# Altium PCB PCB1.PcbDoc (part 2 of 6)
Units mil, origin at the board's own origin, x right, y up, seen from the top; angles counter-clockwise.
Board outline 1280 x 1960 mil, 2 copper layers (Top Layer, Bottom Layer); 44 components, 63 nets, 315 pads, 89 vias.
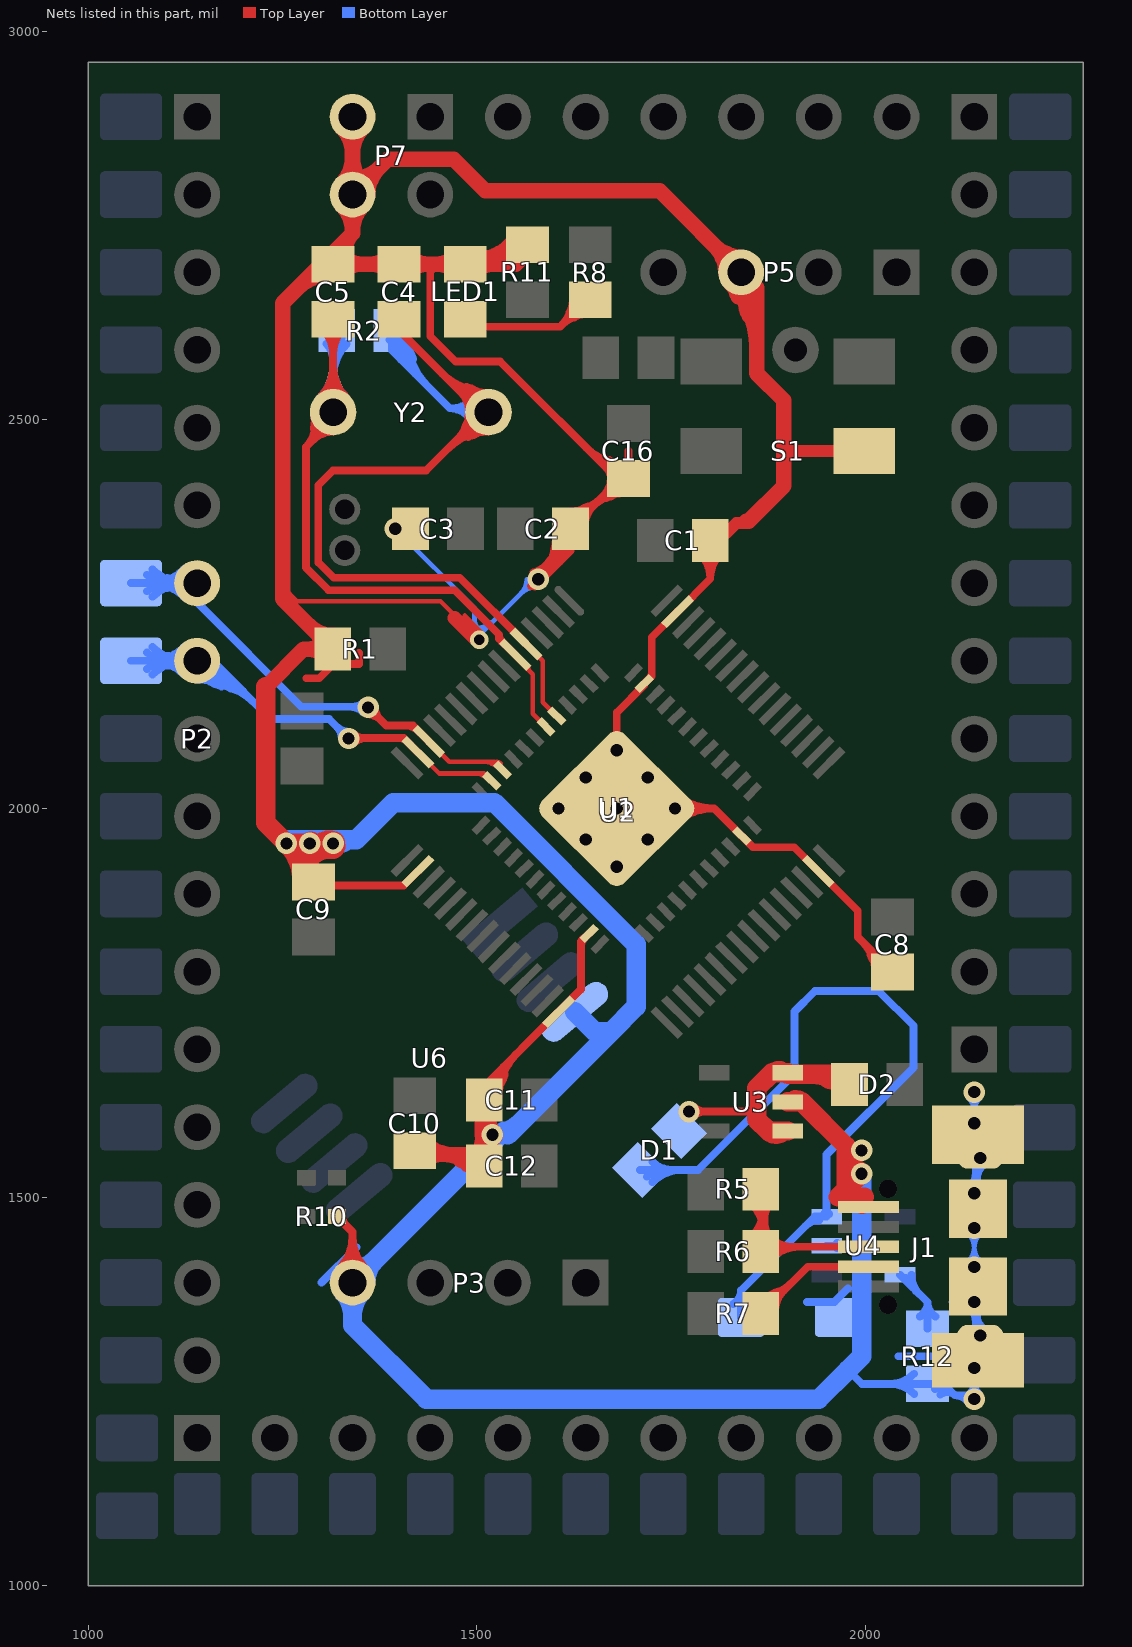
[diagram p2: the nets of this part, all layers, seen from the top]

## Via types
v1: diameter 27.56, hole 15.75, Top Layer to Bottom Layer, tented both sides, 85 vias
v2: diameter 23.62, hole 13.78, Top Layer to Bottom Layer, tented both sides, 4 vias

## Nets (pads, with @x,y where several pads share a name; then routed paths per layer and width w, separated by ;. In a path a pad name is that pad's centre, name@x,y a point inside that pad or via, vN(x,y) a via of type N, cw(c..) or ccw(c..) an arc to the next point about the centre after c; other vN are vias at no path point) (continued)
GND: C1.2 C2.1 C3.1 C4.1 C5.1 C8.2 C9.2 C10.1 C11.2 C12.2 C16.2 J1.0@2145,1290 J1.0@2145,1385 J1.0@2145,1485 J1.0@2145,1580 J1.0@2147.83,1321.83 J1.0@2147.83,1550.17 J1.4 LED1.2 P3.4 P5.3 P7.3 P7.4 pad.1@1680,2000 pad.1@1965,1345 R1.2 R10.1 R11.2 R12.1 S1.1 U1.23 U1.35 U1.47 U2.18 U2.31 U2.47 U2.63 U3.2 U4.2 U6.4 | length 20781.5
  Top Layer w6: 1250,2285 1268.22,2266.78 1453.22,2266.78 v2@1497,2223 ; 1465,2245 1471.24,2245 ; 1484.28,2248.21 1497,2235.49 ; 1486.55,2229.12 ccw(c1498.93,2232.43) v2@1496.36,2219.88 ; 1490.88,2233.45 cw(c1487.57,2221.07) v2@1500.12,2223.64 ; 1481.96,2238.04 ccw(c1497,2253.08) 1497,2231.81 cw(c1497,2253.08) 1481.96,2238.04 ; 1481.96,2238.04 cw(c1466.92,2223) 1488.19,2223 ccw(c1466.92,2223) 1481.96,2238.04
  Top Layer w10: 1280.94,2167.44 1297.21,2167.44 1315.79,2186.02 1348.19,2186.02 1348.19,2200 ; C9.2@1290,1905.43 1294.48,1900.96 1405.87,1900.96 U2.18@1424.17,1919.25 ; R10.1@1320,1475 1340,1455 P3.4@1340,1390 ; C10.1@1420,1559.57 1490.87,1559.57 C12.2@1510,1540.43 ; C10.1@1433.26,1543.45 cw(c1457.05,1502.28) 1469.33,1548.21 ; C10.1@1440.06,1568.89 ccw(c1476.74,1590.09) 1465.8,1549.16 ; 1450,2700.43 1440,2690.43 1440,2607.83 1472.83,2575 1530,2575 1680.43,2424.57 1680.43,2420 C2.1@1620.43,2360 1620.43,2331.49 ; 1466.69,1549.42 ccw(c1477.69,1566.95) C12.2@1494.47,1554.84 ; 1474.38,1554.64 ccw(c1483.71,1570.8) C12.2@1496.65,1557.35 ; 1475.72,1543.75 ccw(c1486.36,1560.69) C12.2@1502.57,1548.98 ; 1483.88,1549.15 cw(c1475.62,1534.84) C12.2@1491.58,1539.12 ; 1484.76,1538.08 ccw(c1495.02,1554.43) C12.2@1510.68,1543.13 ; 1485.89,1547.99 ccw(c1493.3,1560.83) C12.2@1503.59,1550.15 ; C11.2@1507.65,1637.34 ccw(c1502.52,1659.92) 1524.89,1653.93 ; C11.2@1509.57,1625 1509.57,1642.75 U2.31@1605.12,1738.3 1634,1767.18 1634,1828.72 U1.23@1644.51,1839.23 ; C11.2@1510.12,1627.68 ccw(c1491.54,1669.7) 1535.92,1657.81 ; C11.2@1524.04,1650.79 ccw(c1540,1646.51) C11.2@1525.69,1638.25 ; v1@1569.77,2285.83 v1(1578.94,2295) ; v1@1572.73,2303.48 ccw(c1563.46,2338.06) 1594.46,2320.16 ; v1@1575,2303.78 ccw(c1575,2346.55) 1605.25,2316.31 ; v1@1590.65,2301.71 ccw(c1539.43,2352.94) C2.1@1611.82,2355.73 ; C2.1@1601.82,2355.34 cw(c1508.27,2351.73) 1574.47,2285.53 1620.43,2331.49 ; 1606.83,2317.9 ccw(c1570.59,2354.14) C2.1@1621.81,2356.12 ; C2.1@1615.4,2338.13 cw(c1613.54,2331.49) 1620.43,2331.49 ; C2.1@1619.1,2364.31 cw(c1653,2354.85) 1643.9,2388.85 ; C2.1@1625.46,2338.13 ccw(c1627.33,2331.49) 1620.43,2331.49 ; 1663.93,2450.46 cw(c1652.99,2409.62) C16.2@1692.35,2425.07 ; 1666.44,2399.35 ccw(c1656.77,2435.42) C16.2@1692.38,2424.15 ; C16.2@1695,2424.57 1695,2460 ; pad.1@1718.78,1959.98 cw(c1733.23,1960.2) pad.1@1726.51,1973 ; pad.1@1718.78,2040.02 ccw(c1733.23,2039.8) pad.1@1726.51,2027 ; pad.1@1718.86,1960.43 cw(c1735.46,1954.15) pad.1@1731.35,1971.42 ; pad.1@1718.86,2039.57 ccw(c1735.46,2045.85) pad.1@1731.35,2028.58 ; pad.1@1742.18,1987.37 cw(c1763.38,1980.77) pad.1@1754.51,2001.12 ; pad.1@1742.18,2012.63 ccw(c1763.38,2019.23) pad.1@1754.51,1998.88 ; 1837.24,2367.28 1804.96,2335 1800.43,2335 1800.43,2295.43 1758.32,2253.32 U2.63@1758.23,2253.32 1725.1,2220.19 1725.1,2170.38 U1.47@1715.49,2160.77 1715.49,2158.84 1680,2123.34 v1(1680,2075) v1(1680,2000) v1(1755,2000) 1805.28,2000 U1.35@1840.77,1964.51 1855.28,1950 1908.43,1950 U2.47@1939.18,1919.25 1990,1868.43 1990,1834.57 C8.2@2035,1789.57 ; 2006.15,1813.03 ccw(c2040.15,1822.14) C8.2@2030.69,1788.24 ; 1340,1425.07 ccw(c1375.07,1425.07) 1350.27,1400.27 cw(c1375.07,1425.07) 1340,1425.07 ; 1340,1425.07 cw(c1304.93,1425.07) 1329.73,1400.27 ccw(c1304.93,1425.07) 1340,1425.07 ; 1340,1449.21 ccw(c1399.21,1449.21) 1357.34,1407.34 cw(c1399.21,1449.21) 1340,1449.21 ; 1340,1449.21 cw(c1280.79,1449.21) 1322.66,1407.34 ccw(c1280.79,1449.21) 1340,1449.21 ; 1468.89,1559.57 ccw(c1468.89,1514.61) 1437.1,1546.4 cw(c1468.89,1514.61) 1468.89,1559.57 ; 1468.89,1559.57 cw(c1468.89,1604.53) 1437.1,1572.74 ccw(c1468.89,1604.53) 1468.89,1559.57 ; C16.2@1672.44,2424.57 cw(c1642.12,2424.57) 1663.56,2403.13 ccw(c1642.12,2424.57) C16.2@1672.44,2424.57 ; C16.2@1672.44,2424.57 ccw(c1653.15,2424.57) 1666.79,2438.21 cw(c1653.15,2424.57) C16.2@1672.44,2424.57 ; pad.1@1701.2,2000 ccw(c1701.2,1978.8) 1686.21,1993.79 cw(c1701.2,1978.8) pad.1@1701.2,2000 ; pad.1@1701.2,2000 cw(c1701.2,2021.2) 1686.21,2006.21 ccw(c1701.2,2021.2) pad.1@1701.2,2000 ; pad.1@1718.07,1968.56 ccw(c1709.6,2006.16) pad.1@1742.17,1985.57 ; pad.1@1718.07,1968.56 ccw(c1709.6,2006.16) pad.1@1742.17,1985.57 ; pad.1@1718.07,1968.56 ccw(c1709.6,2006.16) pad.1@1742.17,1985.57 ; pad.1@1718.07,1968.56 ccw(c1709.6,2006.16) pad.1@1742.17,1985.57 ; pad.1@1718.07,2031.44 cw(c1709.6,1993.84) pad.1@1742.17,2014.43 ; pad.1@1718.07,2031.44 cw(c1709.6,1993.84) pad.1@1742.17,2014.43 ; pad.1@1718.07,2031.44 cw(c1709.6,1993.84) pad.1@1742.17,2014.43 ; pad.1@1718.07,2031.44 cw(c1709.6,1993.84) pad.1@1742.17,2014.43 ; pad.1@1720.25,1968.78 ccw(c1720.98,1994.77) pad.1@1738.84,1975.87 ; pad.1@1720.25,1968.78 ccw(c1720.98,1994.77) pad.1@1738.84,1975.87 ; pad.1@1720.25,1968.78 ccw(c1720.98,1994.77) pad.1@1738.84,1975.87 ; pad.1@1720.25,2031.22 cw(c1720.98,2005.23) pad.1@1738.84,2024.13 ; pad.1@1720.25,2031.22 cw(c1720.98,2005.23) pad.1@1738.84,2024.13 ; pad.1@1720.25,2031.22 cw(c1720.98,2005.23) pad.1@1738.84,2024.13 ; pad.1@1723.3,1968.13 ccw(c1726.34,1975.6) pad.1@1733.15,1971.29 ; pad.1@1723.3,1968.13 ccw(c1726.34,1975.6) pad.1@1733.15,1971.29 ; pad.1@1723.3,1968.13 ccw(c1726.34,1975.6) pad.1@1733.15,1971.29 ; pad.1@1723.3,1968.13 ccw(c1726.34,1975.6) pad.1@1733.15,1971.29 ; pad.1@1723.3,2031.87 cw(c1726.34,2024.4) pad.1@1733.15,2028.71 ; pad.1@1723.3,2031.87 cw(c1726.34,2024.4) pad.1@1733.15,2028.71 ; pad.1@1723.3,2031.87 cw(c1726.34,2024.4) pad.1@1733.15,2028.71 ; pad.1@1723.3,2031.87 cw(c1726.34,2024.4) pad.1@1733.15,2028.71 ; pad.1@1724.29,1967.66 ccw(c1727.09,1972.67) pad.1@1731.04,1968.5 ; pad.1@1724.29,1967.66 ccw(c1727.09,1972.67) pad.1@1731.04,1968.5 ; pad.1@1724.29,1967.66 ccw(c1727.09,1972.67) pad.1@1731.04,1968.5 ; pad.1@1724.29,2032.34 cw(c1727.09,2027.33) pad.1@1731.04,2031.5 ; pad.1@1724.29,2032.34 cw(c1727.09,2027.33) pad.1@1731.04,2031.5 ; pad.1@1724.29,2032.34 cw(c1727.09,2027.33) pad.1@1731.04,2031.5 ; pad.1@1728.66,1961.43 cw(c1736.5,1962.73) pad.1@1731.04,1968.5 ; pad.1@1728.66,1961.43 cw(c1736.5,1962.73) pad.1@1731.04,1968.5 ; pad.1@1728.66,1961.43 cw(c1736.5,1962.73) pad.1@1731.04,1968.5 ; pad.1@1728.66,2038.57 ccw(c1736.5,2037.27) pad.1@1731.04,2031.5 ; pad.1@1728.66,2038.57 ccw(c1736.5,2037.27) pad.1@1731.04,2031.5 ; pad.1@1728.66,2038.57 ccw(c1736.5,2037.27) pad.1@1731.04,2031.5 ; pad.1@1728.78,1959.75 cw(c1745.15,1959.29) pad.1@1733.9,1971.2 ; pad.1@1728.78,1959.75 cw(c1745.15,1959.29) pad.1@1733.9,1971.2 ; pad.1@1728.78,1959.75 cw(c1745.15,1959.29) pad.1@1733.9,1971.2 ; pad.1@1728.78,2040.25 ccw(c1745.15,2040.71) pad.1@1733.9,2028.8 ; pad.1@1728.78,2040.25 ccw(c1745.15,2040.71) pad.1@1733.9,2028.8 ; pad.1@1728.78,2040.25 ccw(c1745.15,2040.71) pad.1@1733.9,2028.8 ; pad.1@1731.86,1969.26 ccw(c1701.51,2002.15) pad.1@1746.23,2000.35 ; pad.1@1731.86,1969.26 ccw(c1701.51,2002.15) pad.1@1746.23,2000.35 ; pad.1@1731.86,1969.26 ccw(c1701.51,2002.15) pad.1@1746.23,2000.35 ; pad.1@1731.86,2030.74 cw(c1701.51,1997.85) pad.1@1746.23,1999.65 ; pad.1@1731.86,2030.74 cw(c1701.51,1997.85) pad.1@1746.23,1999.65 ; pad.1@1731.86,2030.74 cw(c1701.51,1997.85) pad.1@1746.23,1999.65 ; pad.1@1733.8,2000 ccw(c1733.8,2021.2) 1748.79,2006.21 cw(c1733.8,2021.2) pad.1@1733.8,2000 ; pad.1@1733.8,2000 cw(c1733.8,1978.8) 1748.79,1993.79 ccw(c1733.8,1978.8) pad.1@1733.8,2000 ; pad.1@1736.31,1984.18 ccw(c1720.75,2004.75) pad.1@1746.3,2001.21 ; pad.1@1736.31,1984.18 ccw(c1720.75,2004.75) pad.1@1746.3,2001.21 ; pad.1@1736.31,1984.18 ccw(c1720.75,2004.75) pad.1@1746.3,2001.21 ; pad.1@1736.31,2015.82 cw(c1720.75,1995.25) pad.1@1746.3,1998.79 ; pad.1@1736.31,2015.82 cw(c1720.75,1995.25) pad.1@1746.3,1998.79 ; pad.1@1736.31,2015.82 cw(c1720.75,1995.25) pad.1@1746.3,1998.79 ; pad.1@1740.18,1964.34 ccw(c1719.45,1985.49) pad.1@1746.87,1996.68 ; pad.1@1740.18,1964.34 ccw(c1719.45,1985.49) pad.1@1746.87,1996.68 ; pad.1@1740.18,1964.34 ccw(c1719.45,1985.49) pad.1@1746.87,1996.68 ; pad.1@1740.18,2035.66 cw(c1719.45,2014.51) pad.1@1746.87,2003.32 ; pad.1@1740.18,2035.66 cw(c1719.45,2014.51) pad.1@1746.87,2003.32 ; pad.1@1740.18,2035.66 cw(c1719.45,2014.51) pad.1@1746.87,2003.32 ; pad.1@1741.5,1988.1 cw(c1751.51,1974.87) pad.1@1753.79,1991.3 ; pad.1@1741.5,1988.1 cw(c1751.51,1974.87) pad.1@1753.79,1991.3 ; pad.1@1741.5,1988.1 cw(c1751.51,1974.87) pad.1@1753.79,1991.3 ; pad.1@1741.5,2011.9 ccw(c1751.51,2025.13) pad.1@1753.79,2008.7 ; pad.1@1741.5,2011.9 ccw(c1751.51,2025.13) pad.1@1753.79,2008.7 ; pad.1@1741.5,2011.9 ccw(c1751.51,2025.13) pad.1@1753.79,2008.7 ; pad.1@1749.6,1985.63 ccw(c1735.62,2000.78) pad.1@1756.22,1999.95 ; pad.1@1749.6,1985.63 ccw(c1735.62,2000.78) pad.1@1756.22,1999.95 ; pad.1@1749.6,1985.63 ccw(c1735.62,2000.78) pad.1@1756.22,1999.95 ; pad.1@1749.6,2014.37 cw(c1735.62,1999.22) pad.1@1756.22,2000.05 ; pad.1@1749.6,2014.37 cw(c1735.62,1999.22) pad.1@1756.22,2000.05 ; pad.1@1749.6,2014.37 cw(c1735.62,1999.22) pad.1@1756.22,2000.05 ; pad.1@1750.81,1974.75 ccw(c1734.34,1991.57) pad.1@1756.13,2000.46 ; pad.1@1750.81,1974.75 ccw(c1734.34,1991.57) pad.1@1756.13,2000.46 ; pad.1@1750.81,1974.75 ccw(c1734.34,1991.57) pad.1@1756.13,2000.46 ; pad.1@1750.81,2025.25 cw(c1734.34,2008.43) pad.1@1756.13,1999.54 ; pad.1@1750.81,2025.25 cw(c1734.34,2008.43) pad.1@1756.13,1999.54 ; pad.1@1750.81,2025.25 cw(c1734.34,2008.43) pad.1@1756.13,1999.54 ; pad.1@1761.44,1985.17 ccw(c1749.22,1997.64) pad.1@1765.39,2004.24 ; pad.1@1761.44,1985.17 ccw(c1749.22,1997.64) pad.1@1765.39,2004.24 ; pad.1@1761.44,1985.17 ccw(c1749.22,1997.64) pad.1@1765.39,2004.24 ; pad.1@1761.44,2014.83 cw(c1749.22,2002.36) pad.1@1765.39,1995.76 ; pad.1@1761.44,2014.83 cw(c1749.22,2002.36) pad.1@1765.39,1995.76 ; pad.1@1761.44,2014.83 cw(c1749.22,2002.36) pad.1@1765.39,1995.76 ; pad.1@1763.5,1997.79 cw(c1771.11,1995.81) pad.1@1772.95,2003.46 ; pad.1@1763.5,1997.79 cw(c1771.11,1995.81) pad.1@1772.95,2003.46 ; pad.1@1763.5,1997.79 cw(c1771.11,1995.81) pad.1@1772.95,2003.46 ; pad.1@1763.5,2002.21 ccw(c1771.11,2004.19) pad.1@1772.95,1996.54 ; pad.1@1763.5,2002.21 ccw(c1771.11,2004.19) pad.1@1772.95,1996.54 ; pad.1@1763.5,2002.21 ccw(c1771.11,2004.19) pad.1@1772.95,1996.54 ; pad.1@1769.48,2000 ccw(c1769.48,1944.93) 1722.58,1973.79 cw(c1769.48,1944.93) pad.1@1769.48,2000 ; pad.1@1769.48,2000 cw(c1769.48,2055.07) 1722.58,2026.21 ccw(c1769.48,2055.07) pad.1@1769.48,2000 ; pad.1@1776.2,2000 ccw(c1776.2,1978.8) 1761.21,1993.79 cw(c1776.2,1978.8) pad.1@1776.2,2000 ; pad.1@1776.2,2000 cw(c1776.2,2021.2) 1761.21,2006.21 ccw(c1776.2,2021.2) pad.1@1776.2,2000 ; 1787.38,2000 ccw(c1787.38,1933.92) 1731.1,1968.55 cw(c1787.38,1933.92) 1787.38,2000 ; 1787.38,2000 cw(c1787.38,2066.08) 1731.1,2031.45 ccw(c1787.38,2066.08) 1787.38,2000 ; 1800.43,2296.11 ccw(c1755.48,2296.11) 1787.27,2327.9 cw(c1755.48,2296.11) 1800.43,2296.11 ; 1800.43,2296.11 cw(c1845.39,2296.11) 1813.6,2327.9 ccw(c1845.39,2296.11) 1800.43,2296.11 ; 1805.27,2000 ccw(c1805.27,1922.91) 1739.62,1963.31 cw(c1805.27,1922.91) 1805.27,2000 ; 1805.27,2000 cw(c1805.27,2077.09) 1739.62,2036.69 ccw(c1805.27,2077.09) 1805.27,2000 ; R10.1@1326.81,1475 ccw(c1343.25,1475) 1331.63,1463.37 cw(c1343.25,1475) R10.1@1326.81,1475 ; C10.1@1426.87,1559.57 cw(c1426.87,1461.24) 1496.4,1530.77 ccw(c1426.87,1461.24) C10.1@1426.87,1559.57 ; 1451.01,1559.57 cw(c1451.01,1485.39) 1503.47,1537.84 ccw(c1451.01,1485.39) 1451.01,1559.57 ; 1475.16,1559.57 cw(c1475.16,1509.53) 1510.54,1544.91 ccw(c1475.16,1509.53) 1475.16,1559.57 ; C11.2@1518.19,1628.94 cw(c1572.34,1628.94) 1534.05,1667.23 ccw(c1572.34,1628.94) C11.2@1518.19,1628.94 ; C11.2@1528.19,1628.94 cw(c1606.49,1628.94) 1551.12,1684.3 ccw(c1606.49,1628.94) C11.2@1528.19,1628.94 ; C2.1@1620.43,2372.56 ccw(c1620.43,2402.88) 1641.87,2381.44 cw(c1620.43,2402.88) C2.1@1620.43,2372.56 ; C2.1@1620.43,2382.56 ccw(c1620.43,2437.02) 1658.94,2398.51 cw(c1620.43,2437.02) C2.1@1620.43,2382.56 ; 1634,1821.93 cw(c1650.67,1821.93) 1638.88,1833.72 ccw(c1650.67,1821.93) 1634,1821.93 ; 1634,1826.68 cw(c1641.53,1826.68) 1638.91,1833.74 ccw(c1641.53,1826.68) 1634,1826.68 ; C2.1@1639.05,2363.94 cw(c1674.51,2363.94) 1649.44,2389.01 ccw(c1674.51,2363.94) C2.1@1639.05,2363.94 ; 1641.13,2463.87 ccw(c1691.06,2513.81) 1691.06,2443.19 cw(c1691.06,2513.81) 1641.13,2463.87 ; 1648.92,2388.49 cw(c1691.06,2346.35) 1691.06,2405.94 ccw(c1691.06,2346.35) 1648.92,2388.49 ; 1658.2,2446.8 ccw(c1691.06,2479.67) 1691.06,2433.19 cw(c1691.06,2479.67) 1658.2,2446.8 ; 1665.99,2405.56 cw(c1691.06,2380.49) 1691.06,2415.94 ccw(c1691.06,2380.49) 1665.99,2405.56 ; U1.47@1721.12,2166.28 ccw(c1711.49,2175.91) 1725.1,2175.91 cw(c1711.49,2175.91) U1.47@1721.12,2166.28 ; 1996.49,1828.08 cw(c1957.98,1789.57) 2012.44,1789.57 ccw(c1957.98,1789.57) 1996.49,1828.08 ; 2005.99,1818.57 ccw(c2031.06,1843.64) 2031.06,1808.19 cw(c2031.06,1843.64) 2005.99,1818.57 ; C8.2@2013.56,1811.01 cw(c1992.12,1789.57) 2022.44,1789.57 ccw(c1992.12,1789.57) C8.2@2013.56,1811.01
  Top Layer w15: C1.2@1800.43,2345 1811.42,2345 1833.7,2367.28 1837.24,2367.28 1847.28,2367.28 ; 1895,2460 S1.1@1998.43,2460
  Top Layer w18: 1471.24,2245 v2@1496.36,2219.88 ; 1492.76,2231.25 1503,2221.01 v2(1503,2217)
  Top Layer w20: 1228.5,2156.5 1277,2205 R1.2@1314.57,2205 1250,2269.57 1250,2285 1250,2650 1340,2740 ; C9.2@1290,1905.43 C9.2@1290,1915 ; C5.1@1315,2700.43 C4.1@1400,2700.43 1450,2700.43 ; P7.4@1339.54,2790.09 cw(c1372.6,2783.32) 1363.86,2815.92 ; P7.3@1340,2890 P7.4@1340,2790 ; P7.4@1340.09,2789.54 ccw(c1333.32,2822.6) 1365.92,2813.86 ; LED1.2@1495.75,2712.23 ccw(c1510.45,2737.7) 1518.07,2709.29 ; LED1.2@1500.73,2693.62 cw(c1532.22,2675.44) 1522.81,2710.56 ; 1519.81,2709.11 cw(c1540.68,2683.2) R11.2@1555.14,2713.17 ; R11.2@1575,2725.43 1550,2700.43 ; 1814.08,2713.86 ccw(c1846.68,2722.6) P5.3@1839.91,2689.54 ; 1816.14,2715.92 cw(c1807.4,2683.32) P5.3@1840.46,2690.09 ; 1836.58,2658.2 cw(c1860.65,2672.1) P5.3@1839.64,2690.31 ; P5.3@1839.86,2670.47 cw(c1839.72,2649.54) 1857.84,2660.01 cw(c1876.84,2670.97) P5.3@1857.35,2681.04 ; 1846.55,2369.78 1849.78,2369.78 1895,2415 1895,2460 1895,2525 1860,2560 1860,2670 P5.3@1840,2690 1735,2795 1510.53,2795 1470,2835.53 1385.53,2835.53 P7.4@1340,2790 ; 1850.62,2633.88 cw(c1883.12,2652.64) P5.3@1854.76,2677.21 ; 1281.68,2205 ccw(c1281.68,2237.89) 1304.93,2214.63 cw(c1281.68,2237.89) 1281.68,2205 ; 1281.68,2205 cw(c1281.68,2172.11) 1304.93,2195.37 ccw(c1281.68,2172.11) 1281.68,2205 ; 1340,2740 ccw(c1364.14,2715.86) 1331.83,2704.83 cw(c1364.14,2715.86) 1340,2740 ; 1340,2740 P7.4@1340,2790 ; 1340,2742.86 ccw(c1292.86,2742.86) 1326.19,2776.19 cw(c1292.86,2742.86) 1340,2742.86 ; 1340,2742.86 cw(c1387.14,2742.86) 1353.81,2776.19 ccw(c1387.14,2742.86) 1340,2742.86 ; 1340,2837.14 ccw(c1387.14,2837.14) 1353.81,2803.81 cw(c1387.14,2837.14) 1340,2837.14 ; 1340,2837.14 cw(c1292.86,2837.14) 1326.19,2803.81 ccw(c1292.86,2837.14) 1340,2837.14 ; 1340,2842.86 ccw(c1292.86,2842.86) 1326.19,2876.19 cw(c1292.86,2842.86) 1340,2842.86 ; 1340,2842.86 cw(c1387.14,2842.86) 1353.81,2876.19 ccw(c1387.14,2842.86) 1340,2842.86 ; 1351.82,2700.43 ccw(c1351.82,2667.55) 1328.57,2690.8 cw(c1351.82,2667.55) 1351.82,2700.43 ; 1351.82,2700.43 cw(c1351.82,2733.32) 1328.57,2710.07 ccw(c1351.82,2733.32) 1351.82,2700.43 ; 1363.18,2700.43 ccw(c1363.18,2733.32) 1386.43,2710.07 cw(c1363.18,2733.32) 1363.18,2700.43 ; 1363.18,2700.43 cw(c1363.18,2667.55) 1386.43,2690.8 ccw(c1363.18,2667.55) 1363.18,2700.43 ; 1373.34,2823.34 ccw(c1406.67,2790) 1359.53,2790 cw(c1406.67,2790) 1373.34,2823.34 ; 1373.34,2823.34 cw(c1340,2856.67) 1340,2809.53 ccw(c1340,2856.67) 1373.34,2823.34 ; 1436.82,2700.43 ccw(c1436.82,2667.55) 1413.57,2690.8 cw(c1436.82,2667.55) 1436.82,2700.43 ; 1436.82,2700.43 cw(c1436.82,2733.32) 1413.57,2710.07 ccw(c1436.82,2733.32) 1436.82,2700.43 ; 1448.18,2700.43 ccw(c1448.18,2733.32) 1471.43,2710.07 cw(c1448.18,2733.32) 1448.18,2700.43 ; 1448.18,2700.43 cw(c1448.18,2667.55) 1471.43,2690.8 ccw(c1448.18,2667.55) 1448.18,2700.43 ; 1450,2700.43 ccw(c1450,2729.04) LED1.2@1471.04,2709.66 ; 1450,2700.43 cw(c1450,2671.83) LED1.2@1471.04,2691.21 ; 1450,2700.43 ccw(c1450,2729.04) LED1.2@1471.04,2709.66 ; 1450,2700.43 cw(c1450,2671.83) LED1.2@1471.04,2691.21 ; 1450,2700.43 ccw(c1450,2729.04) LED1.2@1471.04,2709.66 ; 1450,2700.43 cw(c1450,2671.83) LED1.2@1471.04,2691.21 ; 1450,2700.43 ccw(c1450,2729.04) LED1.2@1471.04,2709.66 ; 1450,2700.43 cw(c1450,2671.83) LED1.2@1471.04,2691.21 ; 1450,2700.43 LED1.2@1485,2700.43 ; LED1.2@1485,2700.43 ccw(c1485,2781.02) 1550.06,2733.47 cw(c1485,2781.02) LED1.2@1485,2700.43 ; LED1.2@1485,2700.43 1550,2700.43 ; 1521.82,2700.43 ccw(c1521.82,2667.55) 1498.57,2690.8 cw(c1521.82,2667.55) 1521.82,2700.43 ; 1521.82,2700.43 cw(c1521.82,2733.32) 1498.57,2710.07 ccw(c1521.82,2733.32) 1521.82,2700.43 ; 1550,2700.43 ccw(c1541.54,2708.89) 1550.67,2716.63 cw(c1541.54,2708.89) 1550,2700.43 ; 1806.66,2723.34 ccw(c1840,2756.67) 1840,2709.53 cw(c1840,2756.67) 1806.66,2723.34 ; 1806.66,2723.34 cw(c1773.33,2690) 1820.47,2690 ccw(c1773.33,2690) 1806.66,2723.34 ; 1269.66,2669.66 cw(c1311.06,2628.26) 1311.06,2686.81 ccw(c1311.06,2628.26) 1269.66,2669.66 ; 1284.59,2234.98 ccw(c1314.57,2264.95) 1314.57,2222.56 cw(c1314.57,2264.95) 1284.59,2234.98 ; R1.2@1294.1,2225.47 cw(c1277.56,2208.94) 1300.94,2208.94 ccw(c1277.56,2208.94) R1.2@1294.1,2225.47 ; 1524.39,2700.43 ccw(c1524.39,2752.23) 1566.21,2721.67 cw(c1524.39,2752.23) 1524.39,2700.43 ; P5.3@1826.19,2676.19 cw(c1744.57,2594.57) 1860,2594.57 ccw(c1744.57,2594.57) P5.3@1826.19,2676.19 ; P5.3@1840.33,2690.33 cw(c1792.86,2642.86) 1860,2642.86 ccw(c1792.86,2642.86) P5.3@1840.33,2690.33
  Top Layer w25: 1228.5,2156.5 1228.5,1981.5 v1(1255,1955) ; C9.2@1274.94,1905.63 ccw(c1206.84,1906.83) v1(1255,1955) ; C9.2@1285,1925 v1(1255,1955) ; v1@1310,1955 v1(1285,1955) v1(1255,1955) ; v1@1509.57,1580 C11.2@1509.57,1625 ; C12.2@1510,1540.43 v1@1510,1580 ; 1513.27,1594.46 cw(c1533.27,1599.82) C11.2@1517.85,1613.64 ; C12.2@1514.15,1562.79 cw(c1537.21,1562.79) v1@1520.9,1579.1 ; v1@1514.15,1568.26 ccw(c1532.33,1563.39) C12.2@1518.02,1551.16 ; U3.2@1900,1622.4 1918.29,1622.4 1975.35,1565.35 1975,1565 ; v1(1995,1530) 1975,1510 ; 1998.69,1500 1965,1500 1975,1510 ; C12.2@1501.7,1551.8 ccw(c1481.67,1571.84) 1510,1571.84 cw(c1481.67,1571.84) C12.2@1501.7,1551.8 ; C12.2@1501.7,1551.8 ccw(c1482.72,1570.79) 1509.57,1570.79 ; C12.2@1501.7,1551.8 ccw(c1482.72,1570.79) 1509.57,1570.79 ; C12.2@1501.7,1551.8 ccw(c1482.72,1570.79) 1509.57,1570.79 ; C12.2@1501.7,1551.8 ccw(c1482.72,1570.79) 1509.57,1570.79 ; C12.2@1506.96,1561.07 cw(c1535.32,1553.47) v1@1520.64,1578.89 ; C12.2@1506.96,1561.07 cw(c1535.32,1553.47) v1@1520.64,1578.89 ; C12.2@1506.96,1561.07 cw(c1535.32,1553.47) v1@1520.64,1578.89 ; C12.2@1506.96,1561.07 cw(c1535.32,1553.47) v1@1520.64,1578.89 ; C12.2@1506.96,1561.07 cw(c1535.32,1553.47) v1@1520.64,1578.89 ; C12.2@1506.96,1561.07 cw(c1535.32,1553.47) v1@1520.64,1578.89 ; C12.2@1506.96,1561.07 cw(c1535.32,1553.47) v1@1520.64,1578.89 ; C12.2@1506.96,1561.07 cw(c1535.32,1553.47) v1@1520.64,1578.89 ; C12.2@1506.96,1561.07 cw(c1535.32,1553.47) v1@1520.64,1578.89 ; C12.2@1506.96,1561.07 cw(c1535.32,1553.47) v1@1520.64,1578.89 ; C12.2@1506.96,1561.07 cw(c1535.32,1553.47) v1@1520.64,1578.89 ; C12.2@1506.96,1561.07 cw(c1535.32,1553.47) v1@1520.64,1578.89 ; C12.2@1507.2,1561.37 cw(c1535.07,1553.9) v1@1520.64,1578.89 ; C12.2@1507.2,1561.37 cw(c1535.07,1553.9) v1@1520.64,1578.89 ; C12.2@1507.2,1561.37 cw(c1535.07,1553.9) v1@1520.64,1578.89 ; 1509.57,1570.79 ccw(c1536.42,1570.79) C12.2@1517.43,1551.8 ; 1509.57,1570.79 ccw(c1536.42,1570.79) C12.2@1517.43,1551.8 ; 1509.57,1570.79 ccw(c1536.42,1570.79) C12.2@1517.43,1551.8 ; 1509.57,1570.79 ccw(c1536.42,1570.79) C12.2@1517.43,1551.8 ; 1509.57,1594.21 ccw(c1482.72,1594.21) 1501.7,1613.2 cw(c1482.72,1594.21) 1509.57,1594.21 ; 1509.57,1594.21 cw(c1536.42,1594.21) 1517.43,1613.2 ccw(c1536.42,1594.21) 1509.57,1594.21 ; C12.2@1517.43,1551.8 cw(c1535.37,1569.74) 1510,1569.74 ccw(c1535.37,1569.74) C12.2@1517.43,1551.8 ; v1@1520.9,1579.1 ccw(c1547.23,1552.77) 1510,1552.77 cw(c1547.23,1552.77) v1@1520.9,1579.1 ; 1975,1510 1975,1565 ; 1975,1565 ccw(c2013.14,1565) 1995.59,1531.14 cw(c2013.14,1565) 1975,1565 ; 1277.5,1932.5 cw(c1267.54,1922.54) 1277.89,1912.98 ccw(c1267.54,1922.54) 1277.5,1932.5 ; C11.2@1509.57,1608.28 ccw(c1548.28,1608.28) 1520.9,1580.9 cw(c1548.28,1608.28) C11.2@1509.57,1608.28 ; U3.2@1909.84,1625.06 cw(c1909.84,1611.08) 1919.72,1620.97 ccw(c1909.84,1611.08) U3.2@1909.84,1625.06 ; 1972.54,1500 cw(c1972.54,1467.4) 1995.59,1490.45 ccw(c1972.54,1467.4) 1972.54,1500 ; 1975,1501.72 cw(c2003.16,1501.72) 1995.35,1528.77 ccw(c2003.16,1501.72) 1975,1501.72
  Top Layer w30: 1277.5,1932.5 ccw(c1256.37,1953.63) v1@1286.22,1955.06 ; 1282.94,1937.94 cw(c1315,1905.88) v1@1315,1951.22 ; v1@1291.48,1946.48 cw(c1315,1922.95) v1@1315,1956.22 ; v1@1315,1950 v1@1295,1950 ; v1@1315.23,1956.2 ccw(c1310.95,1934.05) v1@1295,1950 ; v1@1315.78,1950.94 ccw(c1305.9,1939.1) v1@1295,1950
  Bottom Layer w6: v1@1393.8,2359.76 ccw(c1411.29,2363.34) 1406.67,2346.09 ; v1(1395,2360) 1497,2258 1497,2223 1503,2223 v1@1575,2295 ; v1@1395.24,2361.2 cw(c1391.66,2343.71) 1408.91,2348.33 ; v2@1497,2225.81 ccw(c1497,2247.08) 1512.04,2232.04 ; 1497,2231.81 ccw(c1497,2267.57) 1522.28,2242.28 ; 1564.22,2295 cw(c1538.2,2295) 1556.6,2276.6 cw(c1575,2258.2) v1@1575,2284.22 ; 2110,1365 v1(2140,1365) ; v1@2132.38,1247.62 ccw(c2113.98,1266.02) 2140,1266.02 ccw(c2166.02,1266.02) v1@2147.62,1247.62 ; v1@2132.38,1272.38 cw(c2113.98,1253.98) 2140,1253.98 cw(c2166.02,1253.98) v1@2147.62,1272.38 ; v1@2132.38,1287.62 ccw(c2113.98,1306.02) 2140,1306.02 ccw(c2166.02,1306.02) v1@2147.62,1287.62 ; v1@2132.38,1357.38 cw(c2113.98,1338.98) 2140,1338.98 cw(c2166.02,1338.98) v1@2147.62,1357.38 ; v1@2132.38,1372.62 ccw(c2113.98,1391.02) 2140,1391.02 ccw(c2166.02,1391.02) v1@2147.62,1372.62 ; v1@2132.38,1402.38 cw(c2113.98,1383.98) 2140,1383.98 cw(c2166.02,1383.98) v1@2147.62,1402.38 ; v1@2132.38,1417.62 ccw(c2113.98,1436.02) 2140,1436.02 ccw(c2166.02,1436.02) v1@2147.62,1417.62 ; v1@2132.38,1452.38 cw(c2113.98,1433.98) 2140,1433.98 cw(c2166.02,1433.98) v1@2147.62,1452.38 ; v1@2132.38,1467.62 ccw(c2113.98,1486.02) 2140,1486.02 ccw(c2166.02,1486.02) v1@2147.62,1467.62 ; v1@2132.38,1497.38 cw(c2113.98,1478.98) 2140,1478.98 cw(c2166.02,1478.98) v1@2147.62,1497.38 ; v1@2132.38,1512.62 ccw(c2113.98,1531.02) 2140,1531.02 ccw(c2166.02,1531.02) v1@2147.62,1512.62 ; v1@2132.38,1587.38 cw(c2113.98,1568.98) 2140,1568.98 cw(c2166.02,1568.98) v1@2147.62,1587.38 ; v1@2132.38,1602.62 ccw(c2113.98,1621.02) 2140,1621.02 ccw(c2166.02,1621.02) v1@2147.62,1602.62 ; v1@2132.38,1627.38 cw(c2113.98,1608.98) 2140,1608.98 cw(c2166.02,1608.98) v1@2147.62,1627.38 ; v1@2134.61,1289.34 ccw(c2127.34,1301.93) 2141.38,1298.16 ; v1@2134.61,1514.34 ccw(c2121.71,1536.68) 2146.63,1530 ; v1@2134.61,1585.66 cw(c2121.6,1563.13) 2146.73,1569.86 cw(c2171.87,1576.6) v1@2149.34,1589.61 ; v1@2134.84,1355.54 cw(c2123.35,1334.49) 2146.51,1340.7 cw(c2169.67,1346.9) v1@2149.2,1359.39 ; v1@2135.28,1289.69 ccw(c2126.04,1308.64) 2146.41,1303.19 ccw(c2167.5,1297.54) v1@2149.09,1285.8 ; v1(2140,1240) 2140,1245 v1(2140,1280) 2140,1281.81 v1(2140,1365) ; v1@2140,1279.28 cw(c2187.18,1279.28) J1.0@2155.15,1313.91 ; v1@2140,1293 cw(c2174.49,1293) J1.0@2151.07,1318.32 ; 2140,1306.72 cw(c2161.8,1306.72) J1.0@2147,1322.72 ; 2140,1337.15 ccw(c2162.31,1337.15) J1.0@2146.99,1320.94 ; 2140,1351.08 ccw(c2175.46,1351.08) J1.0@2151.11,1325.3 ; v1@2140,1505.25 cw(c2192.75,1505.25) J1.0@2155.45,1542.55 ; 2140,1519.74 cw(c2178.26,1519.74) J1.0@2151.21,1546.79 ; 2140,1534.22 cw(c2163.78,1534.22) J1.0@2146.96,1551.04 ; 2140,1566.09 ccw(c2163.69,1566.09) J1.0@2146.97,1549.31 ; 2140,1580.54 ccw(c2178.11,1580.54) J1.0@2151.2,1553.56 ; v1(2140,1635) v1(2140,1595) ; 2140.41,1294.54 ccw(c2151.61,1291.54) v1@2143.39,1283.37 ; 2143.11,1304.61 ccw(c2160.16,1300.04) v1@2147.64,1287.6 ; 2146.71,1530.31 ccw(c2172.07,1523.51) v1@2149.34,1510.39 ; J1.0@2155.23,1329.66 cw(c2188.61,1365) v1(2140,1365) ; J1.0@2155.44,1557.81 cw(c2192.52,1595) v1(2140,1595) ; 1413.4,2341.6 ccw(c1395,2323.2) 1395,2349.22 cw(c1395,2323.2) 1413.4,2341.6 ; 1413.4,2341.6 cw(c1431.8,2360) 1405.78,2360 ccw(c1431.8,2360) 1413.4,2341.6 ; 1497,2244.27 ccw(c1518.27,2244.27) 1503.23,2229.23 cw(c1518.27,2244.27) 1497,2244.27 ; 1497,2244.27 cw(c1475.73,2244.27) 1490.77,2229.23 ccw(c1475.73,2244.27) 1497,2244.27 ; v1(2140,1365) v1(2140,1410) v1(2140,1460) v1(2140,1505) v1(2140,1595)
  Bottom Layer w10: 1300.13,1390 1345.49,1435.35 ; 1924.71,1365 1960.08,1365 1977.46,1382.38 ; U4.2@1950,1437.4 1992.4,1437.4 1995,1440 ; 1977.5,1277.5 1995.43,1259.57 R12.1@2080,1259.57 2100.43,1259.57 2115,1245 ; 2042.44,1295 2126.81,1295 v1@2140,1281.81 ; v1@2132.58,1235.31 ccw(c2115,1224.21) 2115,1245 ; v1@2140,1245 2115,1245 ; 1971.53,1437.4 ccw(c1971.53,1425.71) 1963.27,1433.98 cw(c1971.53,1425.71) 1971.53,1437.4 ; 1971.53,1437.4 cw(c1971.53,1449.09) 1963.27,1440.83 ccw(c1971.53,1449.09) 1971.53,1437.4 ; 2031.11,1259.57 ccw(c2031.11,1304.52) 2062.9,1272.73 cw(c2031.11,1304.52) 2031.11,1259.57 ; 2031.11,1259.57 cw(c2031.11,1214.61) 2062.9,1246.4 ccw(c2031.11,1214.61) 2031.11,1259.57 ; 2115,1245 ccw(c2105.31,1235.31) 2096.25,1245.59 cw(c2105.31,1235.31) 2115,1245 ; R12.1@2089.64,1253.1 cw(c2098.25,1243.32) 2107.47,1252.53 ccw(c2098.25,1243.32) R12.1@2089.64,1253.1
  Bottom Layer w20: P7.4@1340,2790 P7.4@1350,2790
  Bottom Layer w25: v1@1255,1960 1345,1960 1392.5,2007.5 1522.5,2007.5 1705,1825 1705,1745 1672.5,1712.5 ; v1@1255.9,1954.1 cw(c1270.16,1939.84) 1270.16,1960 ; 1269.84,1960 cw(c1269.84,1939.84) v1@1284.1,1954.1 ; v1@1285.9,1954.1 cw(c1300.16,1939.84) 1300.16,1960 ; v1@1295,1960 cw(c1295,1937.91) v1@1313.91,1949.34 ; 1299.84,1960 cw(c1299.84,1939.84) v1@1314.1,1954.1 ; v1@1315.49,1956.18 ccw(c1321.69,1971.18) 1329.81,1957.12 ; v1@1315.9,1949.1 cw(c1342.23,1922.77) 1342.23,1960 ; v1@1315.9,1954.1 cw(c1330.16,1939.84) 1330.16,1960 ; 1540,1580 1672.5,1712.5 ; U6.4@1626.1,1738.25 1651.85,1712.5 1672.5,1712.5 ; v1(1995,1530) 1995,1440 1995,1295 1977.5,1277.5 1940,1240 1435,1240 1340,1335 P3.4@1340,1390 1535,1585 ; 1340,1348.89 ccw(c1298.89,1348.89) 1327.96,1377.96 cw(c1298.89,1348.89) 1340,1348.89 ; 1340,1348.89 cw(c1381.11,1348.89) 1352.04,1377.96 ccw(c1381.11,1348.89) 1340,1348.89 ; 1369.07,1419.07 ccw(c1398.14,1390) 1357.03,1390 cw(c1398.14,1390) 1369.07,1419.07 ; 1369.07,1419.07 cw(c1340,1448.14) 1340,1407.03 ccw(c1340,1448.14) 1369.07,1419.07 ; 1535,1585 cw(c1524.48,1595.51) 1520.36,1581.23 ccw(c1524.48,1595.51) 1535,1585 ; 1510.74,1560.74 ccw(c1491.49,1580) 1518.72,1580 cw(c1491.49,1580) 1510.74,1560.74 ; v1@1520,1581.28 ccw(c1520,1632.65) 1556.33,1596.33 cw(c1520,1632.65) v1@1520,1581.28
  other v1: 1995,1560 1520,1580 1680,1925 1315,1955 1640,1960 1720,1960 1605,2000 1640,2040 1720,2040
NetD1_1: D1.1 pad.1@1840,1345 U4.3 | length 1338.8
  Bottom Layer w10: D1.1@1709.95,1534.94 1784.94,1534.94 1908.78,1658.78 1908.78,1738.78 1935,1765 2017.3,1765 2062,1720.3 2062,1666.64 1950,1554.64 U4.3@1950,1474.8 1934.8,1474.8 1840,1380 ; pad.1@1840,1345 1840,1380 ; 1840,1380 ccw(c1860.62,1380) 1850.15,1362.23 cw(c1860.62,1380) 1840,1380 ; 1840,1380 cw(c1819.38,1380) 1829.85,1362.23 ccw(c1819.38,1380) 1840,1380 ; 1950,1486.49 ccw(c1961.69,1486.49) 1953.42,1478.23 cw(c1961.69,1486.49) 1950,1486.49 ; 1950,1486.49 cw(c1938.31,1486.49) 1946.58,1478.23 ccw(c1938.31,1486.49) 1950,1486.49 ; D1.1@1718.83,1526.06 cw(c1740.27,1504.62) 1740.27,1534.95 ccw(c1740.27,1504.62) D1.1@1718.83,1526.06 ; D1.1@1725.9,1518.99 cw(c1764.41,1480.48) 1764.41,1534.94 ccw(c1764.41,1480.48) D1.1@1725.9,1518.99 ; D1.1@1725.9,1545.33 ccw(c1750.97,1570.4) 1750.97,1534.94 cw(c1750.97,1570.4) D1.1@1725.9,1545.33 ; 1922.75,1462.75 cw(c1940.16,1445.34) 1940.16,1469.96 ccw(c1940.16,1445.34) 1922.75,1462.75
NetD1_2: D1.2 D2.2 U3.1 U3.3 | length 600.8
  Top Layer w10: v1(1773,1610) 1855,1610 1860,1615 ; 1794.2,1610 ccw(c1794.2,1588.8) 1779.21,1603.79 cw(c1794.2,1588.8) 1794.2,1610 ; 1794.2,1610 cw(c1794.2,1631.2) 1779.21,1616.21 ccw(c1794.2,1631.2) 1794.2,1610
  Top Layer w25: U3.1@1900,1585 1875,1585 ; U3.3@1900,1658 D2.2@1964.76,1658 ; U3.3@1900,1659.8 1879.8,1659.8 1860,1640 1860,1615 1860,1600 1875,1585 ; 1951.17,1652.93 ccw(c1959.16,1666.77) D2.2@1971.19,1656.25 ; D2.2@1964.76,1659.8 D2.2@1979.57,1645 ; 1875,1585 ccw(c1884.77,1594.77) 1891.44,1582.67 cw(c1884.77,1594.77) 1875,1585 ; 1868.82,1591.18 ccw(c1890.16,1612.52) 1890.16,1582.34 cw(c1890.16,1612.52) 1868.82,1591.18 ; 1877.02,1657.02 cw(c1890.16,1643.88) 1890.16,1662.46 ccw(c1890.16,1643.88) 1877.02,1657.02 ; 1930.84,1658 cw(c1930.84,1600.21) 1971.7,1641.07 ccw(c1930.84,1600.21) 1930.84,1658
NetJ1_2: J1.2 R7.2 | length 389.1
  Top Layer w10: R7.2@1864.11,1354.31 cw(c1898.01,1344.85) 1888.9,1378.85 ; R7.2@1865.43,1350 1925.84,1410.41 J1.2@2004.13,1410.41 ; R7.2@1865.43,1362.56 ccw(c1865.43,1392.88) 1886.87,1371.44 cw(c1865.43,1392.88) R7.2@1865.43,1362.56 ; R7.2@1865.43,1372.56 ccw(c1865.43,1427.02) 1903.94,1388.51 cw(c1865.43,1427.02) R7.2@1865.43,1372.56 ; R7.2@1884.06,1353.94 cw(c1919.51,1353.94) 1894.44,1379.01 ccw(c1919.51,1353.94) R7.2@1884.06,1353.94
NetJ1_3: J1.3 R5.1 R6.2 | length 921.9
  Top Layer w10: R6.2@1858.39,1451.18 ccw(c1853.66,1462.75) 1865.74,1465.99 ; R6.2@1865,1430 R6.2@1870,1435 ; R5.1@1865,1510 1870,1505 R6.2@1870,1435 ; 1867.46,1459.56 ccw(c1882.56,1463.61) R6.2@1874.74,1450.06 ; J1.3@2004.13,1436 1871,1436 R6.2@1870,1435 ; R5.1@1858.39,1488.82 cw(c1853.67,1477.25) 1865.74,1474.02 ; R5.1@1858.39,1488.82 cw(c1853.67,1477.25) 1865.74,1474.02 ; R5.1@1858.39,1488.82 cw(c1853.67,1477.25) 1865.74,1474.02 ; 1867.46,1480.45 cw(c1882.56,1476.4) R5.1@1874.74,1489.94 ; 1867.46,1480.45 cw(c1882.56,1476.4) R5.1@1874.74,1489.94 ; 1867.46,1480.45 cw(c1882.56,1476.4) R5.1@1874.74,1489.94 ; R6.2@1878.6,1447.1 cw(c1899.37,1467.87) 1870,1467.87 ccw(c1899.37,1467.87) R6.2@1878.6,1447.1 ; R6.2@1878.6,1447.1 ccw(c1905.41,1473.91) 1905.41,1436 cw(c1905.41,1473.91) R6.2@1878.6,1447.1 ; R6.2@1852.27,1447.1 ccw(c1809.45,1489.92) 1870,1489.92 cw(c1809.45,1489.92) R6.2@1852.27,1447.1 ; R5.1@1852.26,1492.9 cw(c1809.45,1450.08) 1870,1450.08 ccw(c1809.45,1450.08) R5.1@1852.26,1492.9 ; R6.2@1859.34,1440.03 ccw(c1833.6,1465.78) 1870,1465.78 cw(c1833.6,1465.78) R6.2@1859.34,1440.03 ; R5.1@1859.34,1499.97 cw(c1833.59,1474.22) 1870,1474.22 ccw(c1833.59,1474.22) R5.1@1859.34,1499.97 ; 1870,1472.13 cw(c1899.36,1472.13) 1878.6,1492.9 ccw(c1899.36,1472.13) 1870,1472.13 ; R6.2@1871.53,1427.84 cw(c1891.23,1408.14) 1891.23,1436 ccw(c1891.23,1408.14) R6.2@1871.53,1427.84 ; R6.2@1878.6,1420.77 cw(c1915.37,1384) 1915.37,1436 ccw(c1915.37,1384) R6.2@1878.6,1420.77
NetLED1_1: LED1.1 R8.2 | length 379.2
  Top Layer w10: LED1.1@1500,2629.57 1509.62,2619.95 1607.12,2619.95 1641.74,2654.57 R8.2@1650,2654.57 ; 1617.63,2633.37 cw(c1647.82,2625.28) R8.2@1641.66,2655.92 ; 1620.52,2630.21 ccw(c1612.34,2660.74) R8.2@1643.28,2654.28 ; 1609.81,2622.64 cw(c1641.93,2590.51) 1641.93,2635.94 ccw(c1641.93,2590.51) 1609.81,2622.64 ; 1610.28,2623.11 ccw(c1578.82,2654.57) 1623.31,2654.57 cw(c1578.82,2654.57) 1610.28,2623.11
NetR12_2: R12.2 U4.5 | length 249.1
  Bottom Layer w10: U4.5@2044.49,1400 2080,1364.49 ; U4.5@2051.91,1395.81 cw(c2038.08,1371.85) 2064.8,1379.01 ; R12.2@2080,1330.43 2080,1364.49 ; 2080,1364.49 ccw(c2101.82,1364.49) 2090.05,1346.11 cw(c2101.82,1364.49) 2080,1364.49 ; 2080,1364.49 cw(c2058.18,1364.49) 2069.95,1346.11 ccw(c2058.18,1364.49) 2080,1364.49 ; U4.5@2059.17,1400 ccw(c2094.63,1400) 2069.56,1374.93 cw(c2094.63,1400) U4.5@2059.17,1400
OSCI: C4.2 R2.1 U1.5 U2.5 Y2.1 | length 2607.4
  Top Layer w6: U2.5@1563.36,2211.56 1585,2189.92 1585,2136.76 U1.5@1602.75,2119.01 U1.5@1602.75,2121.5
  Top Layer w10: C4.2@1405,2619.57 1405,2610 Y2.1@1507.5,2507.5 ; 1468.53,2547.45 cw(c1452.83,2488.84) Y2.1@1510.27,2508.39 ; 1484.28,2488.67 cw(c1518.92,2479.39) Y2.1@1514.36,2514.96 ; 1484.91,2528.98 ccw(c1516.2,2537.36) Y2.1@1514.78,2505 ; 1486.62,2542.61 cw(c1474.16,2496.1) Y2.1@1519.73,2511.61 ; 1488.97,2478.02 ccw(c1477.65,2520.27) Y2.1@1519.82,2508.67 ; 1490.04,2531.69 cw(c1482.95,2505.22) Y2.1@1510.05,2509.26 ; 1493.02,2489.11 ccw(c1487.08,2511.28) Y2.1@1510.01,2510.23 ; Y2.1@1515,2515 Y2.1@1507.5,2507.5 ; U2.5@1563.36,2211.56 1478.14,2296.78 1315.85,2296.78 1296,2316.63 1296,2416 1315,2435 1435,2435 Y2.1@1507.5,2507.5 ; Y2.1@1490,2510 cw(c1441.72,2510) 1475.86,2475.86 ccw(c1441.72,2510) Y2.1@1490,2510 ; Y2.1@1490,2510 ccw(c1453.79,2510) 1479.39,2535.61 cw(c1453.79,2510) Y2.1@1490,2510 ; 1455.25,2559.75 ccw(c1515,2619.5) 1515,2535 cw(c1515,2619.5) 1455.25,2559.75 ; 1463.79,2463.79 cw(c1515,2412.57) 1515,2485 ccw(c1515,2412.57) 1463.79,2463.79 ; 1472.32,2542.68 ccw(c1515,2585.36) 1515,2525 cw(c1515,2585.36) 1472.32,2542.68 ; 1480.86,2480.86 cw(c1515,2446.72) 1515,2495 ccw(c1515,2446.72) 1480.86,2480.86
  Bottom Layer w10: R2.1@1387.18,2603.08 cw(c1374.23,2571.37) 1407.32,2580.24 ; R2.1@1390.43,2615 1390.43,2589.57 1465,2515 ; R2.1@1391.1,2612.27 cw(c1364.19,2563.59) 1417.92,2577.98 ; R2.1@1395.94,2621.02 cw(c1379.99,2592.17) R2.1@1411.83,2600.7 ; R2.1@1404.91,2589.21 cw(c1420.87,2593.49) R2.1@1406.56,2601.75 ; Y2.1@1515,2515 1465,2515 ; 1465,2515 cw(c1465,2483.34) 1492.94,2498.24 ccw(c1465,2483.34) 1465,2515 ; R2.1@1389.05,2611.06 ccw(c1437.62,2611.06) 1403.28,2576.72 cw(c1437.62,2611.06) R2.1@1389.05,2611.06 ; R2.1@1399.05,2611.06 ccw(c1471.77,2611.06) 1420.35,2559.65 cw(c1471.77,2611.06) R2.1@1399.05,2611.06 ; R2.1@1409.05,2611.06 ccw(c1505.91,2611.06) 1437.42,2542.58 cw(c1505.91,2611.06) R2.1@1409.05,2611.06 ; 1466.72,2515 ccw(c1466.72,2558.28) 1497.32,2527.68 cw(c1466.72,2558.28) 1466.72,2515 ; 1481.67,2515 cw(c1481.67,2492.22) 1501.76,2502.94 ccw(c1481.67,2492.22) 1481.67,2515
OSCO: C5.2 R2.2 U1.6 U2.6 Y2.2 | length 2126.6
  Top Layer w6: U2.6@1549.44,2197.64 1549.44,2195.26 1571.81,2172.88 1571.81,2122.11 U1.6@1588.83,2105.09 ; U2.6@1565.58,2183.5 ccw(c1576.17,2183.5) 1568.68,2176.01 cw(c1576.17,2183.5) U2.6@1565.58,2183.5
  Top Layer w10: 1290.51,2488.3 cw(c1336.74,2487.57) Y2.2@1304.56,2520.77 ; 1296.02,2479.91 ccw(c1287.64,2511.2) Y2.2@1320,2509.78 ; C5.2@1315,2619.57 1315,2515 1315,2500 1280,2465 ; U2.6@1549.44,2197.64 1528.65,2218.43 1528.65,2223.65 ; 1280,2465 ccw(c1251.07,2493.94) 1290.75,2503.91 cw(c1251.07,2493.94) 1280,2465 ; 1280,2465 1280,2310 1309.22,2280.78 1471.51,2280.78 1528.65,2223.65 ; 1315,2546.21 ccw(c1351.21,2546.21) 1325.61,2520.61 cw(c1351.21,2546.21) 1315,2546.21 ; 1315,2546.21 cw(c1278.79,2546.21) 1304.39,2520.61 ccw(c1278.79,2546.21) 1315,2546.21 ; 1315,2570.36 ccw(c1375.36,2570.36) 1332.68,2527.68 cw(c1375.36,2570.36) 1315,2570.36 ; 1315,2570.36 cw(c1254.64,2570.36) 1297.32,2527.68 ccw(c1254.64,2570.36) 1315,2570.36 ; 1315,2584.61 ccw(c1270.04,2584.61) 1301.83,2616.4 cw(c1270.04,2584.61) 1315,2584.61 ; 1315,2584.61 cw(c1359.96,2584.61) 1328.17,2616.4 ccw(c1359.96,2584.61) 1315,2584.61 ; 1528.65,2223.64 ccw(c1542.55,2223.64) 1535.3,2211.78 cw(c1542.55,2223.64) 1528.65,2223.64 ; 1289.39,2474.39 cw(c1315,2448.79) 1315,2485 ccw(c1315,2448.79) 1289.39,2474.39 ; 1292.47,2477.47 ccw(c1271,2498.95) 1300.45,2506.35 cw(c1271,2498.95) 1292.47,2477.47
  Bottom Layer w10: Y2.2@1315,2515 1315,2610.43 R2.2@1319.57,2615 ; 1315,2546.21 ccw(c1351.21,2546.21) 1325.61,2520.61 cw(c1351.21,2546.21) 1315,2546.21 ; 1315,2546.21 cw(c1278.79,2546.21) 1304.39,2520.61 ccw(c1278.79,2546.21) 1315,2546.21 ; 1315,2570.36 ccw(c1375.36,2570.36) 1332.68,2527.68 cw(c1375.36,2570.36) 1315,2570.36 ; 1315,2570.36 cw(c1254.64,2570.36) 1297.32,2527.68 ccw(c1254.64,2570.36) 1315,2570.36 ; R2.2@1306.4,2597.9 cw(c1285.63,2577.13) 1315,2577.13 ccw(c1285.63,2577.13) R2.2@1306.4,2597.9 ; 1315,2555.08 cw(c1375.55,2555.08) 1332.73,2597.9 ccw(c1375.55,2555.08) 1315,2555.08 ; 1315,2579.22 cw(c1351.41,2579.22) 1325.66,2604.97 ccw(c1351.41,2579.22) 1315,2579.22
PA0: P2.7 pad.1@1055,2290 U1.10 U2.14 | length 1775.8
  Top Layer w6: U2.14@1438.08,2086.28 1464.37,2060 1522.56,2060 U1.10@1533.15,2049.41 ; 1518.76,2057.93 ccw(c1524.24,2067.44) U1.10@1527.08,2056.84 ; 1510.83,2060 cw(c1510.83,2038.23) 1526.22,2053.62 ccw(c1510.83,2038.23) 1510.83,2060 ; 1525.31,2060 cw(c1525.31,2052.71) 1530.47,2057.87 ccw(c1525.31,2052.71) 1525.31,2060
  Top Layer w10: v1@1358.8,2129.76 ccw(c1372.87,2132.64) 1369.15,2118.77 ; v1(1360,2130) 1383.34,2106.66 1417.71,2106.66 U2.14@1438.08,2086.28 ; v1@1360.24,2131.2 cw(c1357.36,2117.13) 1371.23,2120.85 ; 1374.99,2115.01 ccw(c1360,2100.02) 1360,2121.22 cw(c1360,2100.02) 1374.99,2115.01 ; 1374.99,2115.01 cw(c1389.98,2130) 1368.78,2130 ccw(c1389.98,2130) 1374.99,2115.01 ; 1408.89,2106.66 cw(c1408.89,2085.38) 1423.94,2100.43 ccw(c1408.89,2085.38) 1408.89,2106.66
  Bottom Layer w10: pad.1@1055,2290 P2.7@1140,2290 1140,2265 1274,2131 1359,2131 v1(1360,2130) ; P2.7@1116.78,2282.1 ccw(c1095.78,2274.96) 1101.52,2296.39 ccw(c1105.72,2312.07) P2.7@1119.38,2303.28 ; P2.7@1116.78,2297.9 cw(c1095.78,2305.04) 1101.52,2283.61 cw(c1105.72,2267.93) P2.7@1119.38,2276.72 ; pad.1@1080.79,2290 ccw(c1080.79,2349.21) 1122.66,2307.34 cw(c1080.79,2349.21) pad.1@1080.79,2290 ; pad.1@1080.79,2290 cw(c1080.79,2230.79) 1122.66,2272.66 ccw(c1080.79,2230.79) pad.1@1080.79,2290 ; pad.1@1086.36,2277.01 cw(c1099.56,2268.97) 1103.56,2283.9 ; pad.1@1086.36,2277.01 cw(c1099.56,2268.97) 1103.56,2283.9 ; pad.1@1086.36,2277.01 cw(c1099.56,2268.97) 1103.56,2283.9 ; pad.1@1086.36,2302.99 ccw(c1099.56,2311.03) 1103.56,2296.1 ; pad.1@1086.36,2302.99 ccw(c1099.56,2311.03) 1103.56,2296.1 ; pad.1@1086.36,2302.99 ccw(c1099.56,2311.03) 1103.56,2296.1 ; pad.1@1088.73,2282.12 cw(c1109.12,2275.35) 1103.56,2296.1 ; pad.1@1088.73,2282.12 cw(c1109.12,2275.35) 1103.56,2296.1 ; pad.1@1088.73,2282.12 cw(c1109.12,2275.35) 1103.56,2296.1 ; pad.1@1088.73,2297.88 ccw(c1109.12,2304.65) 1103.56,2283.9 ; pad.1@1088.73,2297.88 ccw(c1109.12,2304.65) 1103.56,2283.9 ; pad.1@1088.73,2297.88 ccw(c1109.12,2304.65) 1103.56,2283.9 ; 1101.21,2290 ccw(c1101.21,2253.79) 1075.61,2279.39 cw(c1101.21,2253.79) 1101.21,2290 ; 1101.21,2290 cw(c1101.21,2326.21) 1075.61,2300.61 ccw(c1101.21,2326.21) 1101.21,2290 ; 1104.93,2290 ccw(c1104.93,2325.07) 1129.73,2300.27 cw(c1104.93,2325.07) 1104.93,2290 ; 1104.93,2290 cw(c1104.93,2254.93) 1129.73,2279.73 ccw(c1104.93,2254.93) 1104.93,2290 ; P2.7@1125.36,2290 ccw(c1125.36,2229.64) 1082.68,2272.32 cw(c1125.36,2229.64) P2.7@1125.36,2290 ; P2.7@1125.36,2290 cw(c1125.36,2350.36) 1082.68,2307.68 ccw(c1125.36,2350.36) P2.7@1125.36,2290 ; 1336.39,2131 cw(c1336.39,2106.39) 1353.79,2123.79 ccw(c1336.39,2106.39) 1336.39,2131 ; 1341.22,2131 ccw(c1341.22,2148.78) 1353.79,2136.21 cw(c1341.22,2148.78) 1341.22,2131
PA1: P2.8 pad.1@1055,2190 U1.11 U2.15 | length 2194.5
  Top Layer w6: U2.15@1424.17,2072.36 1451.53,2045 1509.72,2045 U1.11@1519.23,2035.49 ; 1505.13,2043.85 ccw(c1510.22,2052.67) U1.11@1513.12,2042.9 ; 1499.52,2045 cw(c1499.52,2026.92) 1512.3,2039.7 ccw(c1499.52,2026.92) 1499.52,2045
  Top Layer w10: v1(1335,2090) 1335.66,2090.66 1405.87,2090.66 U2.15@1424.17,2072.36 ; v1@1341.21,2083.79 cw(c1357.79,2067.21) 1357.79,2090.66 ccw(c1357.79,2067.21) v1@1341.21,2083.79 ; v1@1341.21,2096.21 ccw(c1354.6,2109.6) 1354.6,2090.66 cw(c1354.6,2109.6) v1@1341.21,2096.21 ; 1400,2090.66 cw(c1400,2076.48) 1410.02,2086.51 ccw(c1400,2076.48) 1400,2090.66
  Bottom Layer w10: pad.1@1055,2190 P2.8@1140,2190 1160,2190 1235,2115 1310,2115 v1(1335,2090) ; P2.8@1116.78,2182.1 ccw(c1095.78,2174.96) 1101.52,2196.39 ccw(c1105.72,2212.07) P2.8@1119.38,2203.28 ; P2.8@1116.78,2197.9 cw(c1095.78,2205.04) 1101.52,2183.61 cw(c1105.72,2167.93) P2.8@1119.38,2176.72 ; P2.8@1135.03,2187.7 ccw(c1186.01,2211.29) 1171.47,2157.04 ; P2.8@1144.11,2191.9 ccw(c1211.26,2222.98) 1192.11,2151.51 ; P2.8@1144.3,2191.41 ccw(c1178.9,2202.74) 1169.48,2167.57 ; pad.1@1080.79,2190 ccw(c1080.79,2249.21) 1122.66,2207.34 cw(c1080.79,2249.21) pad.1@1080.79,2190 ; pad.1@1080.79,2190 cw(c1080.79,2130.79) 1122.66,2172.66 ccw(c1080.79,2130.79) pad.1@1080.79,2190 ; pad.1@1086.36,2177.01 cw(c1099.56,2168.97) 1103.56,2183.9 ; pad.1@1086.36,2177.01 cw(c1099.56,2168.97) 1103.56,2183.9 ; pad.1@1086.36,2177.01 cw(c1099.56,2168.97) 1103.56,2183.9 ; pad.1@1086.36,2202.99 ccw(c1099.56,2211.03) 1103.56,2196.1 ; pad.1@1086.36,2202.99 ccw(c1099.56,2211.03) 1103.56,2196.1 ; pad.1@1086.36,2202.99 ccw(c1099.56,2211.03) 1103.56,2196.1 ; pad.1@1088.73,2182.12 cw(c1109.12,2175.35) 1103.56,2196.1 ; pad.1@1088.73,2182.12 cw(c1109.12,2175.35) 1103.56,2196.1 ; pad.1@1088.73,2182.12 cw(c1109.12,2175.35) 1103.56,2196.1 ; pad.1@1088.73,2197.88 ccw(c1109.12,2204.65) 1103.56,2183.9 ; pad.1@1088.73,2197.88 ccw(c1109.12,2204.65) 1103.56,2183.9 ; pad.1@1088.73,2197.88 ccw(c1109.12,2204.65) 1103.56,2183.9 ; 1101.21,2190 ccw(c1101.21,2153.79) 1075.61,2179.39 cw(c1101.21,2153.79) 1101.21,2190 ; 1101.21,2190 cw(c1101.21,2226.21) 1075.61,2200.61 ccw(c1101.21,2226.21) 1101.21,2190 ; 1104.93,2190 ccw(c1104.93,2225.07) 1129.73,2200.27 cw(c1104.93,2225.07) 1104.93,2190 ; 1104.93,2190 cw(c1104.93,2154.93) 1129.73,2179.73 ccw(c1104.93,2154.93) 1104.93,2190 ; P2.8@1125.36,2190 ccw(c1125.36,2129.64) 1082.68,2172.32 cw(c1125.36,2129.64) P2.8@1125.36,2190 ; P2.8@1125.36,2190 cw(c1125.36,2250.36) 1082.68,2207.68 ccw(c1125.36,2250.36) P2.8@1125.36,2190 ; 1320.01,2104.99 ccw(c1335,2119.98) 1335,2098.78 cw(c1335,2119.98) 1320.01,2104.99 ; 1320.01,2104.99 cw(c1305.02,2090) 1326.22,2090 ccw(c1305.02,2090) 1320.01,2104.99 ; P2.8@1140,2165.47 cw(c1140,2057.97) 1216.01,2133.99 ccw(c1140,2057.97) P2.8@1140,2165.47 ; P2.8@1140,2175.47 cw(c1140,2092.12) 1198.94,2151.06 ccw(c1140,2092.12) P2.8@1140,2175.47 ; P2.8@1140,2185.47 cw(c1140,2126.26) 1181.87,2168.13 ccw(c1140,2126.26) P2.8@1140,2185.47